# Altium PCB 如意硬件采集模块0831.PcbDoc (part 2 of 3)
Units mm, origin at the board's own origin, x right, y up, seen from the top; angles counter-clockwise.
Board outline 146 x 59 mm, 2 copper layers (Top Layer, Bottom Layer); 262 components, 188 nets, 705 pads, 120 vias.
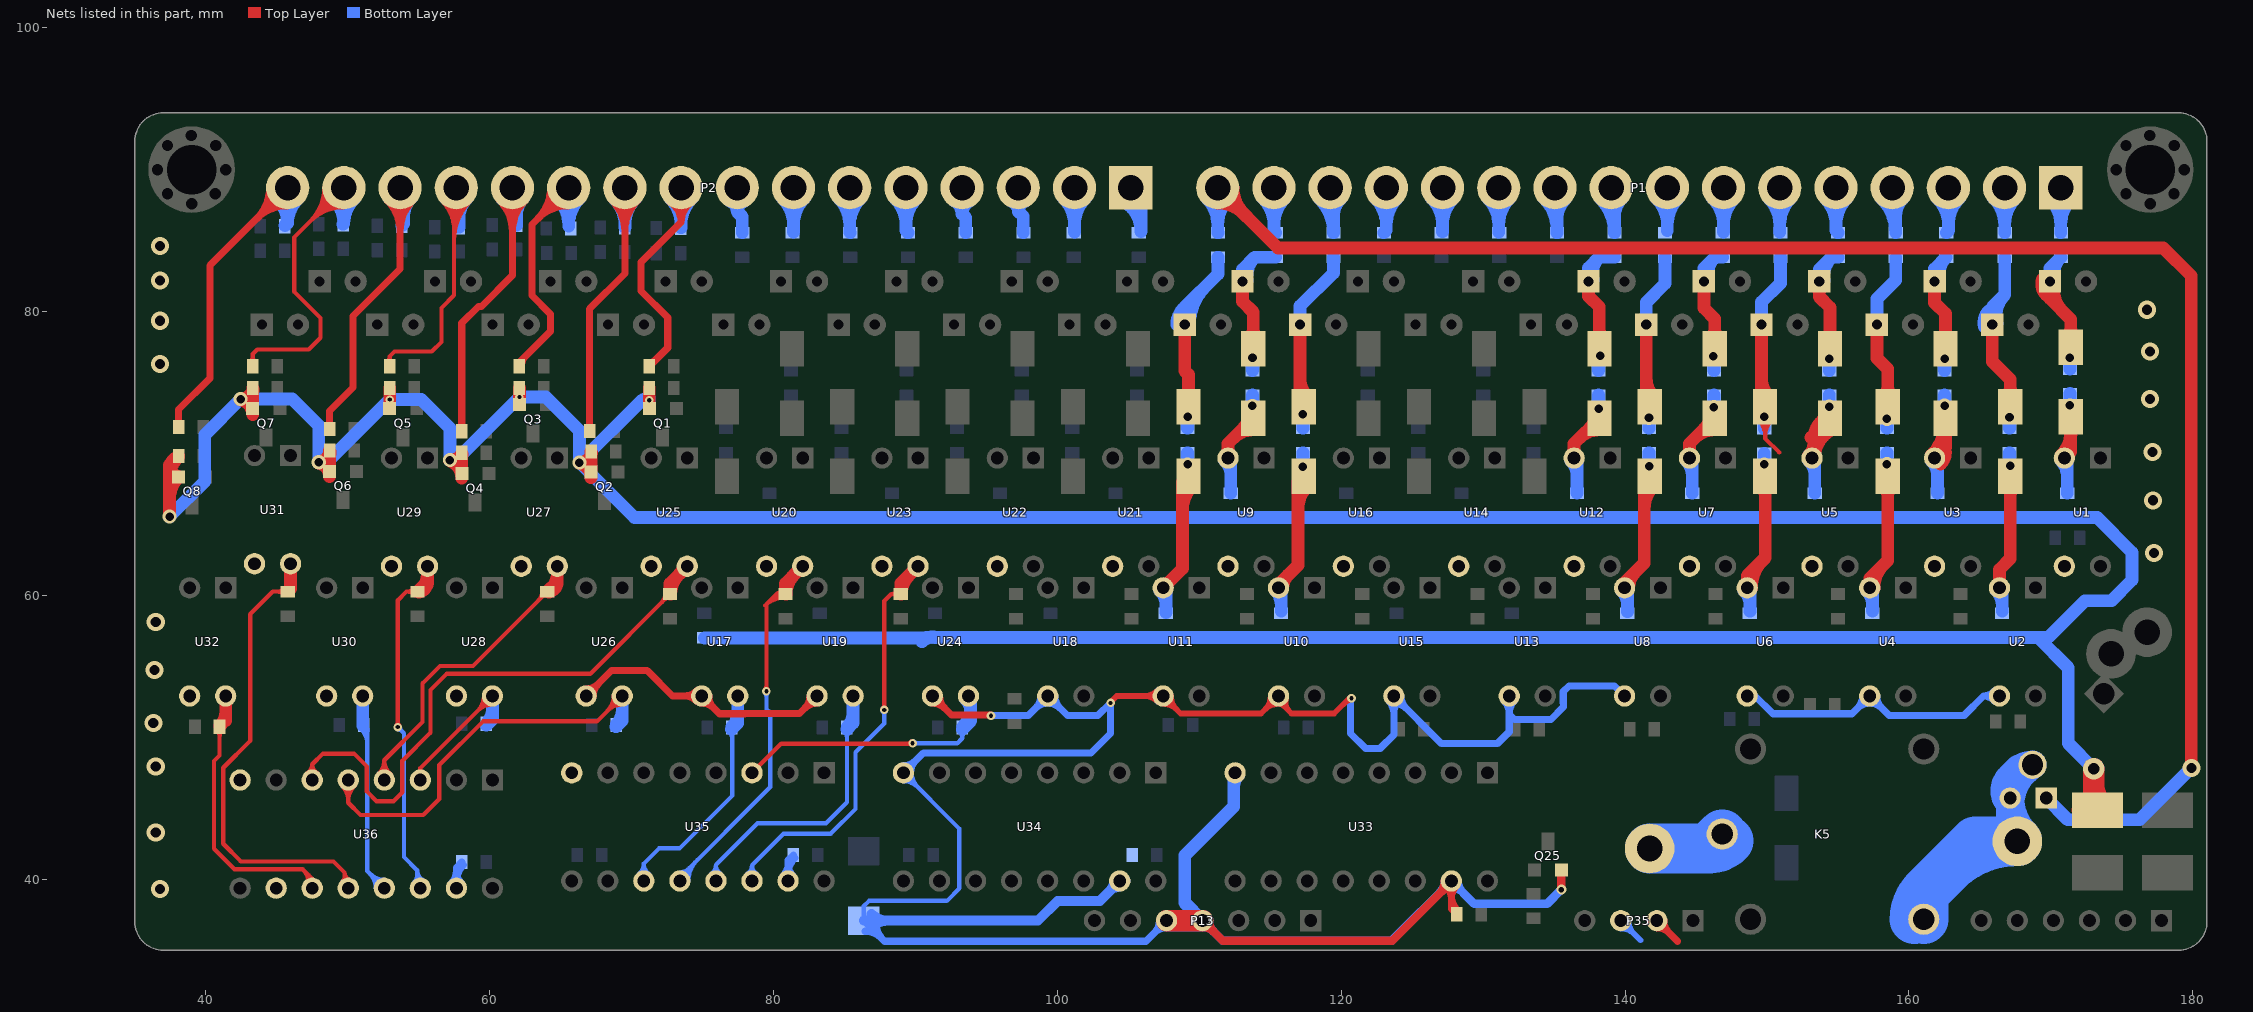
[diagram p2: the nets of this part, all layers, seen from the top]

## Via types
v1: diameter 1, hole 0.6, Top Layer to Bottom Layer, 53 vias
v2: diameter 0.6, hole 0.3, Top Layer to Bottom Layer, 29 vias
v3: diameter 1.27, hole 0.711, Top Layer to Bottom Layer, 19 vias
v4: diameter 1.5, hole 0.8, Top Layer to Bottom Layer, 17 vias
v5: diameter 3, hole 1.8, Top Layer to Bottom Layer, 1 vias
v6: diameter 0.7, hole 0.4, Top Layer to Bottom Layer, 1 vias

## Nets (pads, with @x,y where several pads share a name; then routed paths per layer and width w, separated by ;. In a path a pad name is that pad's centre, name@x,y a point inside that pad or via, vN(x,y) a via of type N, cw(c..) or ccw(c..) an arc to the next point about the centre after c; other vN are vias at no path point) (continued)
_IOIN20: R96.2 U24.4 U35.3 | length 23.9
  Top Layer w0.3: U35.3@78.486,47.498 80.538,49.55 v2@89.8,49.55 ; 89.378,49.55 ccw(c89.378,49.997) v2@89.694,49.681 ; 89.498,49.55 cw(c89.498,49.273) v2@89.694,49.469
  Top Layer w0.9: U24.4@93.738,52.911 U24.4@93.9,52.749
  Bottom Layer w0.3: v2(89.8,49.575) 92.946,49.575 93.303,49.932 93.303,50.568 R96.2@93.303,50.682 ; v2@89.906,49.469 cw(c90.162,49.213) 90.162,49.575 cw(c90.162,49.937) v2@89.906,49.681 ; R96.2@93.122,50.407 cw(c92.684,49.969) 93.303,49.969 cw(c93.922,49.969) R96.2@93.484,50.407
  Bottom Layer w0.9: R96.2@93.303,50.568 93.9,51.165 U24.4@93.9,52.749 ; R96.2@93.334,50.745 ccw(c91.967,52.112) 93.9,52.112 ; U24.4@93.526,52.699 cw(c92.623,51.796) 93.9,51.796
_IOIN21: R95.2 U23.4 U35.14 | length 34.3
  Top Layer w0.3: v2@87.694,52.031 ccw(c87.438,52.287) 87.8,52.287 ccw(c88.162,52.287) v2@87.906,52.031 ; v2(87.8,51.925) 87.8,59.6 88.296,60.096 ; R95.2@88.686,59.924 ccw(c88.296,59.57) 88.296,60.096 ; R95.2@88.686,60.268 cw(c88.296,60.622) 88.296,60.096 ; R95.2@88.969,60.096 88.296,60.096
  Top Layer w0.9: R95.2@88.969,60.096 88.969,60.842 U23.4@90.182,62.055 ; R95.2@89.019,60.096 cw(c90.941,60.096) 89.582,61.455
  Bottom Layer w0.3: U35.14@78.158,40.38 ccw(c77.763,40.986) 78.486,40.986 ; U35.14@78.486,39.878 78.486,40.986 ; U35.14@78.814,40.38 cw(c79.209,40.986) 78.486,40.986 ; v2@87.694,51.819 cw(c87.438,51.563) 87.8,51.563 cw(c88.162,51.563) v2@87.906,51.819 ; v2(87.8,51.925) 87.8,50.975 85.775,48.95 85.775,44.95 84.025,43.2 80.7,43.2 78.486,40.986
_IOIN22: R91.2 U19.4 U35.13 | length 23.6
  Bottom Layer w0.3: U35.13@75.605,40.372 ccw(c75.157,41.021) 75.946,41.021 ; U35.13@75.946,39.878 75.946,41.021 ; U35.13@76.287,40.372 cw(c76.735,41.021) 75.946,41.021 ; R91.2@84.994,50.407 cw(c84.556,49.969) 85.175,49.969 cw(c85.794,49.969) R91.2@85.356,50.407 ; R91.2@85.175,50.682 85.175,50.568 85.175,45.425 83.7,43.95 78.875,43.95 75.946,41.021
  Bottom Layer w0.9: R91.2@85.175,50.568 85.61,51.003 U19.4@85.61,52.911 ; R91.2@85.206,50.745 ccw(c84.23,51.721) 85.61,51.721
_IOIN23: R92.2 U20.4 U35.12 | length 36.8
  Top Layer w0.3: v2@79.394,53.356 ccw(c79.138,53.612) 79.5,53.612 ccw(c79.862,53.612) v2@79.606,53.356 ; 79.411,59.286 cw(c80.747,57.95) R92.2@80.747,59.84 ; v2@79.5,53.275 79.5,59.375 80.221,60.096 ; 79.923,59.798 cw(c80.747,58.974) R92.2@80.747,60.14 ; 79.958,59.833 cw(c80.31,59.48) R92.2@80.599,59.887 ; 80.209,60.084 cw(c80.519,59.774) R92.2@80.773,60.132 ; R92.2@80.546,59.938 ccw(c80.221,59.684) 80.221,60.096 ; R92.2@80.546,60.254 cw(c80.221,60.508) 80.221,60.096 ; R92.2@80.841,60.096 80.221,60.096
  Top Layer w0.9: R92.2@80.841,60.096 80.841,60.842 U20.4@82.054,62.055 ; R92.2@80.891,60.096 cw(c82.813,60.096) 81.454,61.455
  Bottom Layer w0.3: U35.12@73.406,39.878 73.406,40.131 79.775,46.5 79.775,51.725 79.5,52 v2(79.5,53.25) ; U35.12@73.406,40.478 ccw(c73.406,41.316) 73.998,40.723 ; U35.12@73.706,39.878 cw(c75.041,39.878) 74.097,40.822 ; U35.12@74.006,39.878 cw(c76.065,39.878) 74.609,41.334 ; v2@79.394,53.144 cw(c79.138,52.888) 79.5,52.888 cw(c79.862,52.888) v2@79.606,53.144
_IOIN24: R89.2 U17.4 U35.11 | length 20.6
  Bottom Layer w0.3: U35.11@70.494,40.349 ccw(c69.889,41.116) 70.866,41.116 ; U35.11@70.866,39.878 70.866,41.116 ; U35.11@71.238,40.349 cw(c71.843,41.116) 70.866,41.116 ; R89.2@76.866,50.407 cw(c76.3,49.841) 77.1,49.841 ; R89.2@77.047,50.682 77.1,50.629 77.1,50.621 77.1,45.9 73.375,42.175 71.925,42.175 70.866,41.116 ; 77.1,50.097 cw(c77.538,50.097) R89.2@77.228,50.407
  Bottom Layer w0.9: R89.2@77.047,50.568 77.1,50.621 77.482,51.003 U17.4@77.482,52.911 ; R89.2@77.078,50.745 ccw(c76.102,51.721) 77.482,51.721
_IOIN25: R129.2 U25.4 U36.6 | length 44.5
  Top Layer w0.3: U36.6@47.17,47.492 ccw(c46.775,48.098) 47.498,48.098 ; U36.6@47.498,46.99 47.498,48.098 ; U36.6@47.826,47.492 cw(c48.221,48.098) 47.498,48.098 ; 72.116,59.499 ccw(c71.518,60.096) R129.2@72.363,60.096 ; R129.2@72.341,59.724 cw(c72.619,59.447) R129.2@72.619,59.84 ; R129.2@72.713,60.096 67.088,54.471 56.971,54.471 55.829,53.329 55.829,50.329 53.85,48.35 53.85,46.125 53.225,45.5 52.025,45.5 51.35,46.175 51.35,47.95 50.45,48.85 48.25,48.85 47.498,48.098
  Top Layer w0.9: R129.2@72.713,60.096 72.713,60.842 U25.4@73.926,62.055 ; R129.2@72.763,60.096 cw(c74.685,60.096) 73.326,61.455
_IOIN26: R130.2 U26.4 U36.5 | length 34.1
  Top Layer w0.3: U36.5@49.614,46.566 cw(c48.589,45.541) 50.038,45.541 cw(c51.487,45.541) U36.5@50.462,46.566 ; U36.5@50.038,46.99 50.038,45.387 50.9,44.525 55.325,44.525 56.45,45.65 56.45,48.05 59.525,51.125 67.556,51.125 U26.4@69.342,52.911 ; U26.4@68.742,52.911 cw(c67.293,52.911) 68.318,51.887 cw(c69.342,50.862) U26.4@69.342,52.311
  Bottom Layer w0.9: R130.2@68.907,50.743 69.342,51.178 U26.4@69.342,52.911 ; R130.2@68.938,50.92 ccw(c67.962,51.896) 69.342,51.896
_IOIN27: R131.2 U27.4 U36.4 | length 27.2
  Top Layer w0.3: U36.4@52.167,47.427 ccw(c51.273,48.378) 52.578,48.378 ; U36.4@52.578,46.99 52.578,48.378 ; U36.4@52.989,47.427 cw(c53.883,48.378) 52.578,48.378 ; 63.468,59.674 ccw(c62.87,60.271) R131.2@63.715,60.271 ; R131.2@63.693,59.899 cw(c63.971,59.622) R131.2@63.971,60.015 ; R131.2@64.065,60.271 58.819,55.025 56.5,55.025 55.275,53.8 55.275,51.075 52.578,48.378
  Top Layer w0.9: R131.2@64.065,60.271 64.77,60.976 ; R131.2@64.168,60.228 ccw(c64.005,60.976) 64.77,60.976 ; R131.2@64.189,60.24 ccw(c62.788,61.642) U27.4@64.77,61.642 ; U27.4@64.77,62.055 64.77,60.976
_IOIN28: R132.2 U28.4 U36.3 | length 13.6
  Top Layer w0.3: U36.3@55.118,46.99 55.118,47.831 U28.4@60.198,52.911 ; U28.4@59.598,52.911 cw(c58.149,52.911) 59.174,51.887 cw(c60.198,50.862) U28.4@60.198,52.311
  Bottom Layer w0.9: R132.2@59.763,50.843 60.198,51.278 U28.4@60.198,52.911 ; R132.2@59.794,51.02 ccw(c58.818,51.996) 60.198,51.996
_IOIN29: R133.2 U29.4 U36.14 | length 31.5
  Top Layer w0.3: v2@53.419,50.831 ccw(c53.163,51.087) 53.525,51.087 ccw(c53.887,51.087) v2@53.631,50.831 ; v2(53.525,50.725) 53.525,59.65 54.146,60.271 R133.2@54.921,60.271 ; R133.2@54.646,60.09 ccw(c54.208,59.652) 54.208,60.271 ccw(c54.208,60.89) R133.2@54.646,60.452
  Top Layer w0.9: R133.2@54.921,60.271 55.626,60.976 ; R133.2@55.024,60.228 ccw(c54.861,60.976) 55.626,60.976 ; R133.2@55.045,60.24 ccw(c53.644,61.642) U29.4@55.626,61.642 ; U29.4@55.626,62.055 55.626,60.976
  Bottom Layer w0.3: v2@53.525,50.575 cw(c53.525,50.213) 53.781,50.469 cw(c54.037,50.725) v2@53.675,50.725 ; v2(53.525,50.725) 53.964,50.286 53.964,41.561 54.9,40.625 ; U36.14@54.694,39.794 ccw(c54.196,40.292) 54.9,40.292 ; 54.9,40.165 ccw(c55.469,40.165) U36.14@55.239,39.644 ; U36.14@55.118,39.37 54.9,39.588 54.9,40.625 ; U36.14@55.36,39.919 cw(c55.672,40.625) 54.9,40.625
_IOIN30: R134.2 U30.4 U36.13 | length 18.2
  Bottom Layer w0.3: R134.2@50.946,50.582 cw(c49.909,49.546) 51.375,49.546 ; R134.2@51.127,50.857 51.375,50.609 51.375,40.573 U36.13@52.578,39.37 ; R134.2@51.158,50.794 cw(c50.634,50.27) 51.375,50.27 ; U36.13@51.978,39.37 ccw(c50.529,39.37) 51.554,40.394 ccw(c52.578,41.419) U36.13@52.578,39.97
  Bottom Layer w0.9: R134.2@51.054,50.816 U30.4@51.054,52.911
_IOIN31: R135.2 U31.4 U36.12 | length 35.3
  Top Layer w0.3: R135.2@45.502,60.09 ccw(c45.064,59.652) 45.064,60.271 ccw(c45.064,60.89) R135.2@45.502,60.452 ; R135.2@45.777,60.271 44.721,60.271 43.125,58.675 43.125,49.75 41.225,47.85 41.225,42.5 42.471,41.254 48.996,41.254 49.775,40.475 ; U36.12@49.614,39.794 ccw(c49.224,40.184) 49.775,40.184 ; 49.775,40.091 ccw(c50.218,40.091) U36.12@50.111,39.661 ; U36.12@50.038,39.37 49.775,39.633 49.775,40.475 ; U36.12@50.183,39.952 cw(c50.314,40.475) 49.775,40.475
  Top Layer w0.9: R135.2@45.974,60.468 U31.4@45.974,62.23
_IOIN32: R136.2 U32.4 U36.11 | length 23.3
  Top Layer w0.3: R136.2@40.786,50.468 cw(c40.348,50.03) 40.967,50.03 cw(c41.586,50.03) R136.2@41.148,50.468 ; R136.2@40.967,50.743 40.967,48.717 40.575,48.325 40.575,42.15 42.025,40.7 46.825,40.7 47.498,40.027 U36.11@47.498,39.37 ccw(c46.569,39.602) 47.246,40.279 ; 46.871,40.654 cw(c45.969,39.752) U36.11@47.207,39.443
  Top Layer w0.9: R136.2@40.998,50.806 ccw(c40.022,51.782) 41.402,51.782 ; 41.402,51.178 U32.4@41.402,52.911
GND: C1.1 C2.1 C3.1 C4.1 D59.1 P13.4 P13.5 P35.2 Q25.E U1.3 U2.3 U3.3 U4.3 U5.3 U6.3 U7.3 U8.3 U9.3 U10.3 U11.3 U12.3 U13.3 U14.3 U15.3 U16.3 U17.3 U18.3 U19.3 U20.3 U21.3 U22.3 U23.3 U24.3 U25.3 U26.3 U27.3 U28.3 U29.3 U30.3 U31.3 U32.3 U33.8 U33.15 U34.8 U34.15 U35.8 U35.15 U36.8 U36.10 U36.15 | length 325.3
  Top Layer w0.4: v2@103.7,52.425 104.186,52.911 U11.3@107.454,52.911 108.686,51.679 114.35,51.679 U10.3@115.582,52.911 ; v2@103.85,52.425 cw(c104.212,52.425) 103.956,52.681 ; U11.3@107.065,52.522 ccw(c106.126,51.583) 106.126,52.911 ccw(c106.126,54.239) U11.3@107.065,53.3 ; U11.3@107.454,52.361 cw(c107.454,51.033) 108.393,51.972 cw(c109.332,52.911) U11.3@108.004,52.911 ; U10.3@115.032,52.911 cw(c113.704,52.911) 114.643,51.972 cw(c115.582,51.033) 115.582,52.361 cw(c115.582,51.801) 115.978,52.197 ; U10.3@115.582,52.593 116.496,51.679 119.504,51.679 v2@120.65,52.825 ; U10.3@116.108,52.751 ccw(c116.984,52.485) 116.337,51.838 ; 120.298,52.473 cw(c120.725,52.046) v2@120.725,52.65
  Top Layer w0.5: U26.3@66.802,52.911 68.591,54.7 71.1,54.7 72.889,52.911 U17.3@74.942,52.911 76.196,51.657 78.001,51.657 78.019,51.675 81.834,51.675 U19.3@83.07,52.911 ; U26.3@66.802,53.411 ccw(c66.802,54.618) 67.656,53.765 ccw(c68.509,52.911) U26.3@67.302,52.911 ; U17.3@74.588,52.557 ccw(c73.735,51.704) 73.735,52.911 ccw(c73.735,54.118) U17.3@74.588,53.265 ; U17.3@74.942,52.411 cw(c74.942,51.204) 75.796,52.057 cw(c76.649,52.911) U17.3@75.442,52.911 ; U19.3@82.57,52.911 cw(c81.363,52.911) 82.216,52.057 cw(c83.07,51.204) U19.3@83.07,52.411 ; U24.3@91.198,52.411 cw(c91.198,51.204) 92.052,52.057 cw(c92.905,52.911) U24.3@91.698,52.911 ; U24.3@91.198,52.911 92.534,51.575 v2@95.3,51.575 ; U10.3@115.582,52.593 U10.3@115.582,52.911 ; U33.15@127.408,39.524 cw(c126.555,38.671) 127.762,38.671 cw(c128.969,38.671) U33.15@128.116,39.524 ; 127.762,38.918 ccw(c129.429,38.918) C1.1@128.25,37.739 ; U33.15@127.762,39.878 127.762,39.837 127.762,37.913 C1.1@128.14,37.535 ; P35.2@142.24,36.584 cw(c142.24,35.377) 143.094,36.23 cw(c143.947,37.084) P35.2@142.74,37.084 ; P35.2@142.24,37.084 143.693,35.631
  Top Layer w0.6: P13.4@110.236,36.634 cw(c110.236,35.548) 111.004,36.316 cw(c111.772,37.084) P13.4@110.686,37.084 ; P13.4@110.236,37.084 111.639,35.681 123.606,35.681 U33.15@127.762,39.837 ; 126.965,39.04 ccw(c126.127,39.878) U33.15@127.312,39.878 ; 127.064,39.139 cw(c127.762,38.441) U33.15@127.762,39.428 ; v6(135.509,39.266) Q25.E@135.509,40.64
  Top Layer w1.5: P13.5@107.696,37.084 P13.4@110.236,37.084
  Bottom Layer w0.3: D59.1@86.36,37.084 86.36,38.11 86.725,38.475 92.215,38.475 93.1,39.36 93.08,39.38 93.08,43.572 U34.8@89.154,47.498 ; U34.8@89.154,46.898 cw(c89.154,45.449) 90.178,46.474 cw(c91.203,47.498) U34.8@89.754,47.498
  Bottom Layer w0.5: U36.15@57.304,39.724 ccw(c56.451,40.577) 57.658,40.577 ccw(c58.865,40.577) U36.15@58.012,39.724 ; U36.15@57.658,39.37 57.658,40.827 C4.1@58.036,41.205 ; U36.15@57.658,39.822 cw(c59.325,39.822) C4.1@58.146,41.001 ; U35.15@80.672,40.232 ccw(c79.819,41.085) 81.026,41.085 ccw(c82.233,41.085) U35.15@81.38,40.232 ; U35.15@81.026,39.878 81.026,41.335 C3.1@81.404,41.713 ; U35.15@81.026,40.33 cw(c82.693,40.33) C3.1@81.514,41.509 ; D59.1@86.36,37.084 87.813,35.631 106.243,35.631 P13.5@107.696,37.084 ; D59.1@86.46,36.334 cw(c86.46,34.765) 87.57,35.874 ; D59.1@87.21,37.065 ccw(c89.1,37.018) 87.763,35.681 ; U34.8@89.154,47.498 90.556,48.9 102.375,48.9 103.75,50.275 v2(103.75,52.425) 102.85,51.525 100.712,51.525 U18.3@99.326,52.911 97.965,51.55 95.35,51.55 v2(95.325,51.525) ; U34.8@89.154,47.998 ccw(c89.154,49.205) 90.008,48.352 ccw(c90.861,47.498) U34.8@89.654,47.498 ; U18.3@98.826,52.911 cw(c97.619,52.911) 98.472,52.057 cw(c99.326,51.204) 99.326,52.411 cw(c99.326,51.204) 100.18,52.057 cw(c101.033,52.911) U18.3@99.826,52.911 ; P13.5@107.196,37.084 cw(c105.989,37.084) 106.842,36.23 cw(c107.696,35.377) P13.5@107.696,36.584 ; 120.65,52.448 cw(c121.027,52.448) v2@120.76,52.715 ; v2@120.65,52.75 120.65,50.275 121.7,49.225 122.75,49.225 123.71,50.185 U15.3@123.71,52.911 127.071,49.55 131,49.55 131.838,50.388 131.838,51.612 ; U15.3@123.356,52.557 cw(c122.503,51.704) 123.71,51.704 cw(c124.917,51.704) U15.3@124.064,52.557 ; U15.3@123.71,52.411 cw(c123.71,51.204) 124.564,52.057 cw(c125.417,52.911) U15.3@124.21,52.911 ; U13.3@131.484,52.557 cw(c130.631,51.704) 131.838,51.704 cw(c133.045,51.704) U13.3@132.192,52.557 ; U13.3@131.838,52.911 131.838,51.612 ; U8.3@139.966,52.911 139.252,53.625 136.05,53.625 135.646,53.221 135.646,52.417 135.65,52.413 135.65,52.125 134.775,51.25 132.2,51.25 131.838,51.612 ; U6.3@148.602,52.911 149.162,52.911 150.416,51.657 155.984,51.657 U4.3@157.238,52.911 158.599,51.55 163.9,51.55 165.261,52.911 ; U4.3@156.738,52.911 cw(c155.531,52.911) 156.384,52.057 cw(c157.238,51.204) 157.238,52.411 cw(c157.238,51.204) 158.092,52.057 cw(c158.945,52.911) U4.3@157.738,52.911 ; U2.3@166.01,52.577 ccw(c165.261,51.904) 165.261,52.911 ; U2.3@166.01,53.245 cw(c165.261,53.917) 165.261,52.911 ; U2.3@166.382,52.911 165.261,52.911
  Bottom Layer w0.6: P13.4@110.236,36.634 cw(c110.236,35.548) 111.004,36.316 cw(c111.772,37.084) P13.4@110.686,37.084 ; P13.4@110.236,37.084 111.639,35.681 123.565,35.681 U33.15@127.762,39.878 129.365,38.275 134.518,38.275 v6(135.509,39.266) ; U33.15@127.312,39.878 cw(c126.226,39.878) 126.994,39.11 cw(c127.762,38.342) 127.762,39.428 cw(c127.762,38.342) 128.53,39.11 cw(c129.298,39.878) U33.15@128.212,39.878
  Bottom Layer w0.7: D59.1@86.36,37.084 98.634,37.084 100.025,38.475 102.991,38.475 U34.15@104.394,39.878 ; D59.1@86.92,36.624 cw(c88.029,35.515) 88.029,37.084 cw(c88.029,38.653) D59.1@86.92,37.544 ; U34.15@103.994,39.878 cw(c103.028,39.878) 103.711,39.195 cw(c104.394,38.512) U34.15@104.394,39.478
  Bottom Layer w0.9: U34.15@104.394,39.878 U34.15@104.697,39.878 ; P13.5@107.491,37.084 P13.5@107.696,37.084 ; P13.5@107.672,37.084 P13.5@107.696,37.084 ; P13.5@107.716,37.084 P13.5@107.696,37.084 ; P13.4@110.236,37.084 108.975,38.345 108.975,41.675 112.425,45.125 112.425,47.401 U33.8@112.522,47.498 ; 112.425,46.54 cw(c113.48,46.54) U33.8@112.734,47.286
  Bottom Layer w1.5: P13.5@107.716,37.084 P13.4@110.236,37.084
  other v2: 120.725,52.75
  other v3: 36.779,39.325 36.475,43.282 36.475,47.955 36.3,51.003 36.373,54.75 36.475,58.115 177.275,62.992 177.19,66.7 177.15,70.104 176.987,73.825 36.779,76.3 176.987,77.175 36.779,79.35 176.784,80.125 36.779,82.175 36.779,84.625
GND_DI: F2.1 Q1.3 Q2.3 Q3.3 Q4.3 Q5.3 Q6.3 Q7.3 Q8.3 R2.1 R4.1 R6.1 R8.1 R10.1 R12.1 R14.1 R16.1 R34.1 R36.1 R38.1 R40.1 R42.1 R44.1 R46.1 R48.1 R66.1 R68.1 R70.1 R72.1 R74.1 R76.1 R78.1 R80.1 R121.1 R122.1 R123.1 R124.1 R125.1 R126.1 R127.1 R128.1 | length 329.5
  Top Layer w0.9: v1(37.45,65.55) 37.45,69.186 ; 37.45,66.794 cw(c39.652,66.794) Q8.3@38.095,68.351 ; 37.45,68.297 cw(c39.519,68.297) R128.1@38.056,69.76 ; 37.45,68.892 cw(c38.381,68.892) R128.1@38.072,69.771 ; R128.1@38.087,69.823 37.45,69.186 ; Q8.3@38.092,68.363 cw(c38.299,69.186) 37.45,69.186 ; v1@42.437,73.779 cw(c42.245,72.738) Q7.3@43.304,72.738 ; Q7.3@43.3,73.15 ccw(c42.446,72.952) v1(42.446,73.829) ; Q7.3@43.304,73.155 43.304,73.829 ; R127.1@43.304,74.619 43.304,73.829 ; R127.1@43.346,74.514 cw(c42.446,74.761) v1(42.446,73.829) ; v1@47.944,69.329 cw(c47.754,68.376) Q6.3@48.726,68.376 ; v1@47.953,69.428 ccw(c47.951,70.203) R126.1@48.726,70.203 48.726,69.378 ; Q6.3@48.722,68.735 ccw(c47.953,68.598) v1(47.953,69.378) ; Q6.3@48.726,68.739 48.726,69.378 ; R126.1@48.769,70.104 cw(c47.953,70.2) v1(47.953,69.378) ; Q5.3@52.956,73.155 R125.1@52.956,74.619 ; v1@57.186,69.481 cw(c56.746,68.269) Q4.3@58.036,68.269 ; Q4.3@58.039,68.58 58.036,68.583 58.036,69.528 ; R124.1@58.039,70.044 R124.1@58.036,70.047 58.036,69.528 ; R124.1@58.069,69.925 cw(c57.203,70.671) v1(57.203,69.528) 58.036,69.528 ; Q3.3@62.1,73.438 R123.1@62.1,74.619 ; v1@66.319,69.304 cw(c66.118,68.294) Q2.3@67.148,68.294 ; Q2.3@67.144,68.678 ccw(c66.328,68.523) v1(66.328,69.353) ; R122.1@67.148,70.146 67.148,69.353 ; Q2.3@67.151,68.679 67.148,68.682 67.148,69.353 ; R122.1@67.19,70.043 cw(c66.328,70.237) v1(66.328,69.353) ; Q1.3@71.244,73.155 R121.1@71.244,74.619 ; v1(42.446,73.829) 43.304,73.829 ; v1(47.953,69.378) 48.726,69.378 ; v1(66.328,69.353) 67.148,69.353
  Top Layer w1.5: F2.1@172.212,44.872 173.025,45.685 v4(173.025,47.775) ; 173.025,46.712 ccw(c175.127,46.712) F2.1@173.641,45.226
  Bottom Layer w0.9: v1(37.45,65.55) 39.925,68.025 39.925,71.307 v1(42.446,73.829) 46.096,73.829 47.953,71.972 v1(47.953,69.378) 48.534,69.378 v2(52.956,73.8) 55.175,73.8 57.203,71.772 v1(57.203,69.528) 57.653,69.528 v2(62.1,73.975) 63.95,73.975 66.328,71.597 v1(66.328,69.353) ; v1@47.953,69.428 ccw(c47.953,70.951) 49.03,69.874 ; v1@57.203,69.578 ccw(c57.203,70.785) 58.057,69.932 ; v2(71.244,73.75) 70.725,73.75 v1(66.328,69.353) ; R66.1@75.139,57 90.732,57 90.769,57.037 ; 90.463,56.731 cw(c91.266,55.928) R80.1@91.29,57.063 ; 90.5,56.768 cw(c91.219,56.048) R80.1@91.293,57.063 ; R80.1@91.383,57.037 169.088,57.037 171.225,54.9 171.225,49.575 v4(173.025,47.775) ; 169.075,57.05 169.825,57.05 172.4,59.625 174.275,59.625 175.725,61.075 175.725,63.025 173.269,65.481 R2.1@171.151,65.481 R6.1@162.007,65.481 R10.1@153.371,65.481 R14.1@144.735,65.481 R40.1@136.607,65.481 R44.1@128.479,65.481 R48.1@120.351,65.481 R34.1@112.223,65.481 R74.1@104.095,65.481 R76.1@95.967,65.481 R78.1@88.347,65.481 R72.1@79.711,65.481 70.201,65.481 v1(66.328,69.353) ; 70.614,73.639 cw(c71.244,73.01) 71.244,73.9 ccw(c71.244,73.01) 70.614,73.639
GND_DI0: K5.3 P48.1 | length 7
  Bottom Layer w3.5: P48.1@141.732,42.164 145.829,42.164 K5.3@146.845,43.18 ; 145.961,42.164 ccw(c145.961,44.064) K5.3@147.305,42.72
IO_OUT: P35.3 | length 4
  Bottom Layer w0.4: P35.3@139.7,36.534 cw(c139.7,35.206) 140.639,36.145 cw(c141.578,37.084) P35.3@140.25,37.084 ; P35.3@139.7,37.084 141.084,35.7
IOIN1: P1.1 R1.1 | length 7.2
  Bottom Layer w0.9: P1.1@169.941,87.966 cw(c168.107,86.132) 170.7,86.132 cw(c173.293,86.132) P1.1@171.459,87.966 ; R1.1@170.7,85.56 P1.1@170.7,88.725
IOIN2: P1.2 R3.1 | length 7.2
  Bottom Layer w0.9: P1.2@165.981,87.966 cw(c164.121,86.106) 166.751,86.106 ; R3.1@166.751,85.553 P1.2@166.751,88.714 ; 166.751,86.159 cw(c169.306,86.159) P1.2@167.499,87.966
IOIN3: P1.3 R5.1 | length 7.3
  Bottom Layer w0.9: P1.3@162.021,87.966 cw(c160.187,86.132) 162.78,86.132 cw(c165.373,86.132) P1.3@163.539,87.966 ; R5.1@162.629,85.553 162.78,85.704 P1.3@162.78,88.725
IOIN4: P1.4 R7.1 | length 13.1
  Bottom Layer w0.9: P1.4@158.064,87.962 cw(c155.669,85.543) R7.1@159.073,85.543 ; P1.4@158.443,87.719 cw(c158.102,86.81) 159.073,86.81 cw(c160.642,86.81) P1.4@159.56,87.947 ; P1.4@158.82,88.725 158.82,87.08 ; R7.1@159.073,85.553 159.073,86.827 158.82,87.08 ; 159.073,86.743 cw(c160.802,86.743) P1.4@159.579,87.966 ; 158.82,87.08 ccw(c158.097,87.08) 158.388,87.742 cw(c158.097,87.08) 158.82,87.08 ; 158.82,87.08 cw(c159.543,87.08) 159.252,87.742 ccw(c159.543,87.08) 158.82,87.08
IOIN5: P1.5 R9.1 | length 7.3
  Bottom Layer w0.9: P1.5@154.101,87.966 cw(c152.267,86.132) 154.86,86.132 cw(c157.453,86.132) P1.5@155.619,87.966 ; P1.5@154.86,88.725 154.86,85.702 R9.1@155.009,85.553
IOIN6: P1.6 R11.1 | length 7.2
  Bottom Layer w0.9: P1.6@150.141,87.966 cw(c148.307,86.132) 150.9,86.132 cw(c153.493,86.132) P1.6@151.659,87.966 ; R11.1@150.9,85.598 P1.6@150.9,88.725
IOIN7: P1.7 R13.1 | length 7.2
  Bottom Layer w0.9: P1.7@146.181,87.966 cw(c144.347,86.132) 146.94,86.132 cw(c149.533,86.132) P1.7@147.699,87.966 ; R13.1@146.94,85.612 P1.7@146.94,88.725
IOIN8: P1.8 R15.1 | length 7.1
  Bottom Layer w0.9: P1.8@142.221,87.966 cw(c140.387,86.132) 142.98,86.132 cw(c145.573,86.132) P1.8@143.739,87.966 ; R15.1@142.98,85.716 P1.8@142.98,88.725
IOIN9: P1.9 R39.1 | length 7.3
  Bottom Layer w0.9: P1.9@138.261,87.966 cw(c135.845,85.55) R39.1@139.261,85.55 ; P1.9@139.02,88.725 139.02,87.605 139.261,87.364 R39.1@139.261,85.553 ; 139.261,86.714 cw(c141.031,86.714) P1.9@139.779,87.966
IOIN10: P1.10 R41.1 | length 7.3
  Bottom Layer w0.9: P1.10@134.301,87.966 cw(c132.136,85.801) R41.1@135.197,85.801 ; P1.10@135.06,88.725 135.197,88.588 R41.1@135.197,85.553 ; 135.197,86.463 cw(c137.322,86.463) P1.10@135.819,87.966
IOIN11: P1.11 R43.1 | length 7.2
  Bottom Layer w0.9: P1.11@130.341,87.966 cw(c128.507,86.132) 131.1,86.132 cw(c133.693,86.132) P1.11@131.859,87.966 ; R43.1@131.1,85.586 P1.11@131.1,88.725
IOIN12: P1.12 R45.1 | length 7.2
  Bottom Layer w0.9: P1.12@126.381,87.966 cw(c124.547,86.132) 127.14,86.132 cw(c129.733,86.132) P1.12@127.899,87.966 ; R45.1@127.14,85.624 P1.12@127.14,88.725
IOIN13: P1.13 R47.1 | length 7.3
  Bottom Layer w0.9: P1.13@122.421,87.966 cw(c120.587,86.132) 123.18,86.132 cw(c125.773,86.132) P1.13@123.939,87.966 ; R47.1@123.005,85.553 123.18,85.728 P1.13@123.18,88.725
IOIN14: P1.14 R35.1 | length 13.5
  Bottom Layer w0.9: P1.14@118.461,87.966 cw(c116.074,85.579) R35.1@119.449,85.579 ; P1.14@118.815,87.73 cw(c118.431,86.788) 119.449,86.788 cw(c121.019,86.788) P1.14@119.951,87.938 ; P1.14@119.22,88.725 119.22,87.03 ; R35.1@119.449,85.553 119.449,86.801 119.22,87.03 ; 119.449,86.685 cw(c121.26,86.685) P1.14@119.979,87.966 ; 119.22,87.03 ccw(c118.42,87.03) 118.761,87.754 cw(c118.42,87.03) 119.22,87.03 ; 119.22,87.03 cw(c120.02,87.03) 119.679,87.754 ccw(c120.02,87.03) 119.22,87.03
IOIN15: P1.15 R33.1 | length 7.3
  Bottom Layer w0.9: P1.15@114.501,87.966 cw(c112.667,86.132) 115.26,86.132 cw(c117.853,86.132) P1.15@116.019,87.966 ; P1.15@115.26,88.725 115.26,85.678 R33.1@115.385,85.553
IOIN16: P1.16 P5.1 R37.1 | length 129.5
  Top Layer w0.9: P1.16@111.3,87.651 cw(c111.3,85.058) 113.133,86.892 cw(c114.967,88.725) P1.16@112.374,88.725 ; P1.16@111.3,88.725 115.55,84.475 177.925,84.475 179.9,82.5 v3(179.9,47.85)
  Bottom Layer w0.9: P1.16@110.541,87.966 cw(c108.707,86.132) 111.3,86.132 cw(c113.893,86.132) P1.16@112.059,87.966 ; P1.16@111.3,88.725 111.3,85.574 R37.1@111.321,85.553 ; P5.1@169.672,45.72 171.196,44.196 176.246,44.196 v3(179.9,47.85)
IOIN17: P2.1 R73.1 | length 7.6
  Bottom Layer w0.9: P2.1@104.64,87.79 cw(c103.423,85.632) R73.1@105.9,85.632 ; P2.1@105.082,88.573 cw(c104.293,87.174) 105.9,87.174 ; P2.1@105.168,88.725 105.9,87.993 R73.1@105.9,85.72
IOIN18: P2.2 R67.1 | length 7.2
  Bottom Layer w0.9: P2.2@100.449,87.966 cw(c98.615,86.132) 101.208,86.132 cw(c103.801,86.132) P2.2@101.967,87.966 ; R67.1@101.208,85.6 P2.2@101.208,88.725
IOIN19: P2.3 R75.1 | length 6.8
  Bottom Layer w0.9: P2.3@97.248,88.725 97.248,87.052 ; R75.1@97.605,85.553 97.605,86.695 97.248,87.052 ; 97.248,87.052 ccw(c96.482,87.052) 96.801,87.748 cw(c96.482,87.052) 97.248,87.052 ; 97.248,87.052 cw(c98.014,87.052) 97.695,87.748 ccw(c98.014,87.052) 97.248,87.052
IOIN20: P2.4 R79.1 | length 7.8
  Bottom Layer w0.9: P2.4@93.288,88.725 93.288,86.862 ; R79.1@93.541,85.553 93.541,86.609 93.288,86.862 ; 93.288,86.862 ccw(c92.209,86.862) 92.75,87.796 cw(c92.209,86.862) 93.288,86.862 ; 93.288,86.862 cw(c94.367,86.862) 93.826,87.796 ccw(c94.367,86.862) 93.288,86.862
IOIN21: P2.5 R77.1 | length 7.3
  Bottom Layer w0.9: P2.5@88.569,87.966 cw(c86.735,86.132) 89.328,86.132 cw(c91.921,86.132) P2.5@90.087,87.966 ; P2.5@89.328,88.725 89.328,85.702 R77.1@89.477,85.553
IOIN22: P2.6 R69.1 | length 7.3
  Bottom Layer w0.9: P2.6@84.609,87.966 cw(c82.775,86.132) 85.368,86.132 cw(c87.961,86.132) P2.6@86.127,87.966 ; P2.6@85.368,88.725 85.368,85.598 R69.1@85.413,85.553
IOIN23: P2.7 R71.1 | length 7.2
  Bottom Layer w0.9: P2.7@80.649,87.966 cw(c78.815,86.132) 81.408,86.132 cw(c84.001,86.132) P2.7@82.167,87.966 ; R71.1@81.408,85.612 P2.7@81.408,88.725
IOIN24: P2.8 R65.1 | length 6.9
  Bottom Layer w0.9: P2.8@77.448,88.725 77.448,87.027 ; R65.1@77.793,85.553 77.793,86.682 77.448,87.027 ; 77.448,87.027 ccw(c76.643,87.027) 76.988,87.755 cw(c76.643,87.027) 77.448,87.027 ; 77.448,87.027 cw(c78.253,87.027) 77.908,87.755 ccw(c78.253,87.027) 77.448,87.027
IOIN25: P2.9 R97.1 R105.1 | length 25.7
  Top Layer w0.5: R105.1@71.244,76.143 72.55,77.449 72.55,79.575 70.675,81.45 70.675,83.475 73.488,86.288 ; R105.1@71.244,76.393 ccw(c71.244,76.997) 71.671,76.57 ; P2.9@72.761,87.679 cw(c71.794,86.288) 73.488,86.288 ; P2.9@73.488,88.725 73.488,86.288 ; P2.9@74.215,87.679 ccw(c75.182,86.288) 73.488,86.288
  Bottom Layer w0.9: P2.9@72.729,87.966 cw(c70.895,86.132) 73.488,86.132 cw(c76.081,86.132) P2.9@74.247,87.966 ; R97.1@73.488,85.905 P2.9@73.488,88.725
IOIN26: P2.10 R98.1 R106.1 | length 32.8
  Top Layer w0.5: R106.1@67.042,71.573 67.042,80.192 69.528,82.678 P2.10@69.528,88.725 ; P2.10@68.627,87.824 cw(c66.452,85.649) 69.528,85.649 cw(c72.604,85.649) P2.10@70.429,87.824 ; P2.10@68.981,88.178 cw(c67.659,86.856) 69.528,86.856 cw(c71.397,86.856) P2.10@70.075,88.178
  Bottom Layer w0.9: P2.10@68.769,87.966 cw(c66.935,86.132) 69.528,86.132 cw(c72.121,86.132) P2.10@70.287,87.966 ; R98.1@69.528,85.924 P2.10@69.528,88.725
IOIN27: P2.11 R99.1 R107.1 | length 30.3
  Top Layer w0.5: R107.1@62.1,76.143 62.1,76.425 64.274,78.599 64.274,79.833 62.983,81.125 62.983,86.14 P2.11@65.568,88.725 ; R107.1@62.256,76.237 cw(c63.088,76.237) 62.5,76.825 ; P2.11@64.294,88.725 cw(c61.218,88.725) 63.393,86.55 cw(c65.568,84.375) P2.11@65.568,87.451 ; P2.11@64.794,88.725 cw(c62.925,88.725) 64.247,87.404 cw(c65.568,86.082) P2.11@65.568,87.951
  Bottom Layer w0.9: P2.11@64.809,87.966 cw(c62.975,86.132) 65.568,86.132 cw(c68.161,86.132) P2.11@66.327,87.966 ; R99.1@65.568,86.002 P2.11@65.568,88.725
IOIN28: P2.12 R100.1 R108.1 | length 32.6
  Top Layer w0.5: R108.1@58.036,71.571 58.036,79.186 59.214,80.364 59.414,80.364 61.608,82.558 P2.12@61.608,88.725 ; P2.12@60.707,87.824 cw(c58.532,85.649) 61.608,85.649 cw(c64.684,85.649) P2.12@62.509,87.824 ; P2.12@61.061,88.178 cw(c59.739,86.856) 61.608,86.856 cw(c63.477,86.856) P2.12@62.155,88.178
  Bottom Layer w0.9: P2.12@60.987,87.849 cw(c59.738,86.085) R100.1@61.899,86.085 ; P2.12@61.608,88.725 61.608,87.492 61.899,87.201 R100.1@61.899,86.101 ; 61.899,86.835 cw(c63.498,86.835) P2.12@62.367,87.966
IOIN29: P2.13 R101.1 R109.1 | length 36.5
  Top Layer w0.3: R109.1@52.78,76.423 ccw(c52.396,76.831) 52.956,76.831 ; R109.1@52.956,76.143 52.956,76.831 ; R109.1@53.132,76.423 cw(c53.516,76.831) 52.956,76.831 ; P2.13@56.676,87.753 cw(c54.701,85.778) 57.495,85.778 ; P2.13@56.889,87.966 cw(c55.425,86.502) 57.495,86.502 ; 57.495,85.038 cw(c61.335,85.038) P2.13@58.62,87.753 ; 57.495,85.762 cw(c60.611,85.762) P2.13@58.407,87.966 ; 57.495,86.486 cw(c59.887,86.486) P2.13@58.195,88.178 ; P2.13@57.648,88.725 57.495,88.572 57.495,81.145 56.6,80.25 56.6,77.85 55.925,77.175 53.3,77.175 52.956,76.831
  Bottom Layer w0.9: P2.13@56.945,87.913 cw(c55.233,85.936) R101.1@57.848,85.936 ; P2.13@57.37,87.688 cw(c57.203,87.065) 57.848,87.065 cw(c58.788,87.065) P2.13@58.256,87.84 ; P2.13@57.648,88.725 57.648,87.277 57.848,87.077 R101.1@57.848,85.943 ; 57.848,86.615 cw(c59.758,86.615) P2.13@58.407,87.966
IOIN30: P2.14 R102.1 R110.1 | length 35.1
  Top Layer w0.5: R110.1@48.726,71.727 48.726,73.001 50.375,74.65 50.375,79.675 53.688,82.988 P2.14@53.688,88.725 ; P2.14@52.787,87.824 cw(c50.612,85.649) 53.688,85.649 cw(c56.764,85.649) P2.14@54.589,87.824 ; P2.14@53.141,88.178 cw(c51.819,86.856) 53.688,86.856 cw(c55.557,86.856) P2.14@54.235,88.178
  Bottom Layer w0.9: P2.14@53.078,87.841 cw(c51.929,86.178) R102.1@53.95,86.178 ; P2.14@53.38,87.696 cw(c53.151,86.931) 53.95,86.931 cw(c55.264,86.931) P2.14@54.397,87.918 ; P2.14@53.688,88.725 53.688,87.212 53.95,86.95 53.95,86.192 R102.1@53.801,86.043 ; 53.95,86.765 cw(c55.648,86.765) P2.14@54.447,87.966
IOIN31: P2.15 R103.1 R111.1 | length 38.6
  Top Layer w0.3: R111.1@43.122,76.418 ccw(c42.685,76.856) 43.304,76.856 ccw(c43.923,76.856) R111.1@43.485,76.418 ; R111.1@43.304,76.143 43.304,77.004 43.625,77.325 47.25,77.325 48.075,78.15 48.075,79.55 46.225,81.4 46.225,85.222 P2.15@49.728,88.725 ; P2.15@48.354,88.725 cw(c45.037,88.725) 47.382,86.379 cw(c49.728,84.034) P2.15@49.728,87.351 ; P2.15@48.654,88.725 cw(c46.061,88.725) 47.895,86.892 cw(c49.728,85.058) P2.15@49.728,87.651 ; P2.15@48.954,88.725 cw(c47.085,88.725) 48.407,87.404 cw(c49.728,86.082) P2.15@49.728,87.951
  Bottom Layer w0.9: P2.15@48.983,87.951 cw(c47.297,86.2) R103.1@49.728,86.2 ; R103.1@49.674,86.146 R103.1@49.728,86.2 ; P2.15@49.728,88.725 R103.1@49.728,86.2 ; P2.15@50.473,87.951 ccw(c52.159,86.2) R103.1@49.728,86.2
IOIN32: P2.16 R104.1 R112.1 | length 34.7
  Top Layer w0.5: R112.1@38.087,71.855 38.087,73.087 40.3,75.3 40.3,83.257 P2.16@45.768,88.725 ; P2.16@44.494,88.725 cw(c41.418,88.725) 43.593,86.55 cw(c45.768,84.375) P2.16@45.768,87.451 ; P2.16@44.994,88.725 cw(c43.125,88.725) 44.447,87.404 cw(c45.768,86.082) P2.16@45.768,87.951
  Bottom Layer w0.9: P2.16@45.028,87.946 cw(c43.39,86.223) R104.1@45.768,86.223 ; R104.1@45.581,86.068 ccw(c45.13,86.519) 45.768,86.519 ; P2.16@45.768,88.725 R104.1@45.768,86.223 ; P2.16@46.508,87.946 ccw(c48.146,86.223) R104.1@45.768,86.223
IOIN_1: D56.1 K5.4 P5.2 P46.1 | length 48.3
  Bottom Layer w2: P5.2@167.132,45.237 cw(c170.44,45.237) D56.1@168.711,48.057 ; P5.2@167.132,45.709 ccw(c170.677,45.709) P46.1@168.17,43.202 ; P5.2@167.132,46.24 cw(c168.967,46.24) D56.1@168.711,48.057 ; P46.1@167.64,42.672 167.132,43.18 P5.2@167.132,45.72 167.132,47.157 ; 167.132,47.157 ccw(c168.056,46.233) 166.913,45.599 cw(c168.056,46.233) 167.132,47.157 ; 167.132,47.157 167.757,47.782 167.132,47.157 ; D56.1@168.711,48.057 ccw(c168.711,46.418) 167.552,47.577 cw(c168.711,46.418) D56.1@168.711,48.057 ; P5.2@166.882,45.72 cw(c169.748,45.72) 167.721,47.746 ccw(c169.748,45.72) P5.2@166.882,45.72
  Bottom Layer w3.5: K5.4@160.395,37.18 cw(c163.268,37.18) 161.236,39.211 ; K5.4@161.045,37.18 161.045,39.02 164.697,42.672 P46.1@167.64,42.672 ; 162.616,40.591 cw(c167.64,35.567) P46.1@167.64,42.672 ; 163.226,41.201 cw(c166.904,37.522) P46.1@167.64,42.672
NetD1_1: D1.1 R2.2 R17.1 U1.2 | length 10.6
  Top Layer w0.9: U1.2@170.742,69.887 ccw(c169.148,71.481) D1.1@171.402,71.481 ; U1.2@170.954,69.675 171.402,70.123 D1.1@171.402,72.57 ; D1.1@171.119,71.887 cw(c170.434,71.203) 171.402,71.203 cw(c172.37,71.203) D1.1@171.685,71.887
  Bottom Layer w0.9: U1.2@170.742,69.463 cw(c169.754,68.475) 171.151,68.475 ; R2.2@171.151,67.208 U1.2@171.151,69.478 ; v1(171.345,73.38) R17.1@171.345,74.218
NetD1_2: D1.2 LD1.1 R1.2 R17.2 | length 18.5
  Top Layer w0.9: LD1.1@169.394,82.265 ccw(c170.505,81.97) 169.692,81.158 ; LD1.1@169.938,82.121 169.938,80.912 171.402,79.448 D1.2@171.402,77.47 ; LD1.1@170.264,82.034 ccw(c172.251,81.507) 170.797,80.053 ; D1.2@171.119,78.153 ccw(c170.434,78.837) 171.402,78.837 ccw(c172.37,78.837) D1.2@171.685,78.153 ; 169.938,81.306 ccw(c169.123,81.306) 169.699,81.882 cw(c169.123,81.306) 169.938,81.306 ; 169.938,81.306 cw(c170.753,81.306) 170.177,81.882 ccw(c170.753,81.306) 169.938,81.306
  Bottom Layer w0.9: LD1.1@169.699,82.36 ccw(c169.123,82.936) 169.938,82.936 ccw(c170.753,82.936) LD1.1@170.177,82.36 ; LD1.1@169.938,82.121 169.938,83.057 R1.2@170.707,83.826 ccw(c171.904,82.629) LD1.1@170.265,82.205 ; R17.2@171.345,75.945 v1(171.345,76.73)
NetD2_1: D2.1 R4.2 R18.1 U2.2 | length 12.9
  Top Layer w0.9: U2.2@166.382,60.531 166.382,61.832 167.144,62.594 D2.1@167.144,68.405 ; D2.1@166.861,67.722 cw(c166.176,67.038) 167.144,67.038 cw(c168.112,67.038) D2.1@167.427,67.722
  Bottom Layer w0.9: U2.2@166.17,60.319 cw(c165.182,59.331) 166.579,59.331 ; R4.2@166.579,58.9 U2.2@166.579,60.334 ; v1@167.087,69.387 R18.1@167.087,70.053
  other v1: 167.15,69.15
NetD2_2: D2.2 LD2.1 R3.2 R18.2 | length 19.7
  Top Layer w0.9: LD2.1@165.635,78.834 cw(c165.059,78.258) 165.874,78.258 cw(c166.689,78.258) LD2.1@166.113,78.834 ; LD2.1@165.874,79.073 165.874,76.476 167.144,75.206 D2.2@167.144,73.305 ; D2.2@166.861,73.988 ccw(c166.176,74.672) 167.144,74.672 ccw(c168.112,74.672) D2.2@167.427,73.988
  Bottom Layer w0.9: LD2.1@165.329,78.932 cw(c166.472,79.228) 165.637,80.062 ; LD2.1@165.635,79.312 ccw(c165.059,79.888) 165.874,79.888 ccw(c166.689,79.888) LD2.1@166.113,79.312 ; LD2.1@165.874,79.073 165.874,80.299 166.751,81.176 ; LD2.1@166.201,79.157 cw(c168.242,79.685) 166.751,81.176 ; R3.2@166.751,83.826 166.751,81.176 ; R18.2@167.087,71.78 v1(167.087,72.562)
NetD3_1: D3.1 R6.2 R19.1 U3.2 | length 12.3
  Top Layer w0.9: U3.2@161.598,69.887 ccw(c159.246,72.239) D3.1@162.572,72.239 ; U3.2@161.81,69.675 162.572,70.437 D3.1@162.572,72.469 ; U3.2@162.234,69.251 ccw(c161.419,70.066) 162.572,70.066 ; D3.1@162.289,71.786 cw(c161.604,71.102) 162.572,71.102 cw(c163.54,71.102) D3.1@162.855,71.786
  Bottom Layer w0.9: U3.2@161.598,69.463 cw(c160.61,68.475) 162.007,68.475 ; R6.2@162.007,67.208 U3.2@162.007,69.478 ; v1(162.515,73.36) R19.1@162.515,74.117
NetD3_2: D3.2 LD4.1 R5.2 R19.2 | length 12.5
  Top Layer w0.9: LD4.1@161.571,81.882 cw(c160.995,81.306) 161.81,81.306 cw(c162.625,81.306) LD4.1@162.049,81.882 ; LD4.1@161.81,82.121 161.81,80.615 162.572,79.853 D3.2@162.572,77.369 ; D3.2@162.289,78.052 ccw(c161.604,78.736) 162.572,78.736 ccw(c163.54,78.736) D3.2@162.855,78.052
  Bottom Layer w0.9: LD4.1@161.81,82.121 161.81,83.007 R5.2@162.629,83.826 ccw(c163.899,82.555) LD4.1@162.14,82.19 ; R19.2@162.515,75.844 v1(162.515,76.665)
NetD4_1: D4.1 R8.2 R20.1 U4.2 | length 15.1
  Top Layer w0.9: U4.2@157.238,60.531 157.238,61.188 158.508,62.458 D4.1@158.508,68.405 ; U4.2@157.538,60.531 cw(c159.848,60.531) 158.215,62.165 ; D4.1@158.225,67.722 cw(c157.54,67.038) 158.508,67.038 cw(c159.476,67.038) D4.1@158.791,67.722
  Bottom Layer w0.9: U4.2@157.026,60.319 cw(c156.038,59.331) 157.435,59.331 ; R8.2@157.435,58.9 U4.2@157.435,60.334 ; v1(158.451,69.249) R20.1@158.451,70.053
NetD4_2: D4.2 LD5.1 R7.2 R20.2 | length 16.1
  Top Layer w0.9: LD5.1@157.507,78.834 cw(c156.931,78.258) 157.746,78.258 cw(c158.561,78.258) LD5.1@157.985,78.834 ; LD5.1@157.746,79.073 157.746,76.704 158.508,75.942 D4.2@158.508,73.305 ; D4.2@158.225,73.988 ccw(c157.54,74.672) 158.508,74.672 ccw(c159.476,74.672) D4.2@158.791,73.988
  Bottom Layer w0.9: LD5.1@157.507,79.312 ccw(c156.931,79.888) 157.746,79.888 ccw(c158.561,79.888) LD5.1@157.985,79.312 ; LD5.1@157.746,79.073 157.746,80.896 159.073,82.223 R7.2@159.073,83.826 ; R20.2@158.451,71.78 v1(158.451,72.449)
NetD5_1: D5.1 R10.2 R21.1 U5.2 | length 16.1
  Top Layer w0.9: U5.2@152.962,69.887 ccw(c152.146,70.703) 153.3,70.703 ; 153.101,71.126 cw(c154.413,69.813) D5.1@154.439,71.669 ; U5.2@153.174,69.675 153.3,69.801 153.3,71.325 D5.1@154.444,72.469 ; U5.2@153.3,69.529 cw(c155.761,69.529) D5.1@154.628,71.714 ; 153.3,71.009 cw(c154.994,71.009) D5.1@154.214,72.513 ; D5.1@153.738,71.763 ccw(c152.289,73.212) D5.1@154.337,73.286
  Bottom Layer w0.9: U5.2@152.962,69.463 cw(c151.974,68.475) 153.371,68.475 ; R10.2@153.371,67.208 U5.2@153.371,69.478 ; v1(154.387,73.288) R21.1@154.387,74.117
NetD5_2: D5.2 LD6.1 R9.2 R21.2 | length 14.9
  Top Layer w0.9: LD6.1@153.682,82.121 153.682,81.043 154.444,80.281 D5.2@154.444,77.369 ; D5.2@154.161,78.052 ccw(c153.476,78.736) 154.444,78.736 ccw(c155.412,78.736) D5.2@154.727,78.052 ; 153.682,81.306 ccw(c152.867,81.306) 153.443,81.882 cw(c152.867,81.306) 153.682,81.306 ; 153.682,81.306 cw(c154.497,81.306) 153.921,81.882 ccw(c154.497,81.306) 153.682,81.306
  Bottom Layer w0.9: LD6.1@153.682,82.121 153.682,82.957 R9.2@154.551,83.826 ; LD6.1@154.015,82.174 cw(c155.902,82.475) R9.2@154.551,83.826 ; 154.368,83.643 cw(c154.915,83.095) R9.2@154.915,83.87 ; R21.2@154.387,75.844 v1(154.387,76.687) ; R9.2@155.009,83.826 R9.2@154.551,83.826
NetD6_1: D6.1 R12.2 R22.1 U6.2 | length 15.4
  Top Layer w0.9: U6.2@148.602,60.531 148.602,61.377 149.872,62.647 D6.1@149.872,68.405 ; U6.2@148.902,60.531 cw(c151.669,60.531) 149.712,62.487 ; D6.1@149.589,67.722 cw(c148.904,67.038) 149.872,67.038 cw(c150.84,67.038) D6.1@150.155,67.722
  Bottom Layer w0.9: U6.2@148.39,60.319 cw(c147.402,59.331) 148.799,59.331 ; R12.2@148.799,58.875 U6.2@148.799,60.334 ; v1(149.803,69.228) R22.1@149.803,70.02
NetD6_2: D6.2 LD3.1 R11.2 R22.2 | length 25.8
  Top Layer w0.3: D6.2@149.376,72.41 cw(c148.18,71.214) 149.872,71.214 cw(c151.564,71.214) D6.2@150.368,72.41 ; D6.2@149.556,72.325 cw(c148.791,71.56) 149.872,71.56 ; D6.2@149.589,72.622 cw(c148.904,71.938) 149.872,71.938 cw(c150.84,71.938) D6.2@150.155,72.622 ; D6.2@149.625,72.874 ccw(c149.371,73.305) D6.2@149.872,73.305 149.872,71.058 150.871,70.059 ; 149.872,71.894 cw(c150.481,71.894) D6.2@150.05,72.325 ; D6.2@149.872,73.25 ccw(c150.481,73.25) D6.2@150.05,72.819
  Top Layer w0.9: LD3.1@149.379,78.834 cw(c148.803,78.258) 149.618,78.258 cw(c150.433,78.258) LD3.1@149.857,78.834 ; D6.2@149.618,73.559 LD3.1@149.618,79.073 ; 149.618,75.285 ccw(c151.453,75.285) D6.2@150.155,73.988
  Bottom Layer w0.9: LD3.1@149.379,79.312 ccw(c148.803,79.888) 149.618,79.888 ccw(c150.433,79.888) LD3.1@149.857,79.312 ; LD3.1@149.618,79.073 149.618,80.668 150.945,81.995 R11.2@150.945,83.826 ; R22.2@149.803,71.747 v1(149.803,72.572)
NetD7_1: D7.1 R14.2 R23.1 U7.2 | length 11
  Top Layer w0.9: U7.2@144.538,69.675 144.538,70.691 D7.1@146.316,72.469 ; 144.95,71.103 cw(c146.316,69.738) D7.1@146.316,71.669 ; D7.1@145.57,71.723 ccw(c144.027,73.266) D7.1@146.209,73.266
  Bottom Layer w0.9: U7.2@144.326,69.463 cw(c143.338,68.475) 144.735,68.475 ; R14.2@144.735,67.208 U7.2@144.735,69.478 ; v1(146.259,73.266) R23.1@146.259,74.117
NetD7_2: D7.2 LD7.1 R13.2 R23.2 | length 15
  Top Layer w0.9: LD7.1@145.315,81.882 cw(c144.739,81.306) 145.554,81.306 cw(c146.369,81.306) LD7.1@145.793,81.882 ; LD7.1@145.554,82.121 145.554,80.246 146.316,79.484 D7.2@146.316,77.369 ; D7.2@146.033,78.052 ccw(c145.348,78.736) 146.316,78.736 ccw(c147.284,78.736) D7.2@146.599,78.052
  Bottom Layer w0.9: LD7.1@145.315,82.36 ccw(c144.739,82.936) 145.554,82.936 ccw(c146.369,82.936) LD7.1@145.793,82.36 ; LD7.1@145.554,82.121 145.554,83.054 146.326,83.826 ; LD7.1@145.881,82.204 cw(c147.528,82.624) 146.326,83.826 ; 146.074,83.574 cw(c146.787,82.861) R13.2@146.787,83.87 ; R23.2@146.259,75.844 v1@146.259,76.609 ; R13.2@146.881,83.826 146.326,83.826
  other v1: 146.225,76.85
NetD8_1: D8.1 R16.2 R24.1 U8.2 | length 15
  Top Layer w0.9: U8.2@139.966,60.531 139.966,60.891 141.35,62.275 141.35,68.011 D8.1@141.744,68.405 ; U8.2@140.266,60.531 cw(c141.859,60.531) 140.733,61.658 ; 141.35,66.087 cw(c143.663,66.087) D8.1@142.027,67.722
  Bottom Layer w0.9: U8.2@139.754,60.319 cw(c138.766,59.331) 140.163,59.331 ; R16.2@140.163,58.85 U8.2@140.163,60.334 ; v1@141.687,69.312 R24.1@141.687,70.053
  other v1: 141.7,69.1
NetD8_2: D8.2 LD8.1 R15.2 R24.2 | length 15.5
  Top Layer w0.9: LD8.1@141.251,78.834 cw(c140.675,78.258) 141.49,78.258 cw(c142.305,78.258) LD8.1@141.729,78.834 ; D8.2@141.49,73.559 LD8.1@141.49,79.073 ; 141.49,75.285 ccw(c143.325,75.285) D8.2@142.027,73.988
  Bottom Layer w0.9: LD8.1@141.251,79.312 ccw(c140.675,79.888) 141.49,79.888 ccw(c142.305,79.888) LD8.1@141.729,79.312 ; LD8.1@141.49,79.073 141.49,80.64 142.817,81.967 R15.2@142.817,83.826 ; R24.2@141.687,71.78 v1(141.687,72.513)
NetD9_1: D9.1 R34.2 R49.1 U9.2 | length 11.3
  Top Layer w0.9: U9.2@112.026,69.675 112.026,70.691 D9.1@113.804,72.469 ; 112.438,71.103 cw(c113.804,69.738) D9.1@113.804,71.669 ; D9.1@112.996,71.661 ccw(c111.305,73.353) D9.1@113.697,73.353
  Bottom Layer w0.9: U9.2@111.814,69.463 cw(c110.826,68.475) 112.223,68.475 ; U9.2@112.026,69.675 112.223,69.478 R34.2@112.223,67.208 ; v1(113.747,73.353) R49.1@113.747,74.117
NetD9_2: D9.2 LD9.1 R33.2 R49.2 | length 13.9
  Top Layer w0.9: LD9.1@112.803,81.882 cw(c112.227,81.306) 113.042,81.306 cw(c113.857,81.306) LD9.1@113.281,81.882 ; LD9.1@113.042,82.121 113.042,80.708 113.804,79.946 D9.2@113.804,77.369 ; D9.2@113.521,78.052 ccw(c112.836,78.736) 113.804,78.736 ccw(c114.772,78.736) D9.2@114.087,78.052
  Bottom Layer w0.9: LD9.1@113.042,82.121 113.042,82.967 113.901,83.826 ; LD9.1@113.375,82.177 cw(c115.235,82.492) 113.901,83.826 ; R49.2@113.747,75.844 v1@113.747,76.528 ; R33.2@115.385,83.826 113.901,83.826
  other v1: 113.75,76.75
NetD10_1: D10.1 R36.2 R50.1 U10.2 | length 15
  Top Layer w0.9: U10.2@115.582,60.531 115.582,60.757 116.95,62.125 116.95,67.995 D10.1@117.36,68.405 ; U10.2@115.882,60.531 cw(c117.152,60.531) 116.254,61.429 ; 116.95,66.048 cw(c119.318,66.048) D10.1@117.643,67.722
  Bottom Layer w0.9: U10.2@115.37,60.319 cw(c114.382,59.331) 115.779,59.331 ; R36.2@115.779,58.875 U10.2@115.779,60.334 ; v1(117.303,69.078) R50.1@117.303,70.053
NetD10_2: D10.2 LD10.1 R35.2 R50.2 | length 17.5
  Top Layer w0.9: LD10.1@116.867,78.834 cw(c116.291,78.258) 117.106,78.258 cw(c117.921,78.258) LD10.1@117.345,78.834 ; D10.2@117.106,73.559 LD10.1@117.106,79.073 ; 117.106,75.285 ccw(c118.941,75.285) D10.2@117.643,73.988 ; D10.2@117.106,73.368 ccw(c117.899,73.368) 117.338,72.807 cw(c117.899,73.368) D10.2@117.106,73.368
  Bottom Layer w0.9: LD10.1@116.867,79.312 ccw(c116.291,79.888) 117.106,79.888 ccw(c117.921,79.888) LD10.1@117.345,79.312 ; LD10.1@117.106,79.073 117.106,80.381 119.449,82.724 R35.2@119.449,83.826 ; R50.2@117.303,71.78 v1(117.303,72.772)
NetD11_1: D11.1 R38.2 R51.1 U11.2 | length 13.9
  Top Layer w0.9: U11.2@107.454,60.531 108.825,61.902 108.825,67.998 D11.1@109.232,68.405 ; 108.825,66.055 cw(c111.182,66.055) D11.1@109.515,67.722
  Bottom Layer w0.9: U11.2@107.242,60.319 cw(c106.254,59.331) 107.651,59.331 ; R38.2@107.651,58.8 U11.2@107.651,60.334 ; v1(109.175,69.225) R51.1@109.175,70.053
NetD11_2: D11.2 LD11.1 R37.2 R51.2 | length 20.7
  Top Layer w0.9: LD11.1@108.739,78.834 cw(c108.163,78.258) 108.978,78.258 cw(c109.793,78.258) LD11.1@109.217,78.834 ; D11.2@108.949,73.988 ccw(c108.264,74.672) 109.232,74.672 ccw(c110.2,74.672) D11.2@109.515,73.988 ; LD11.1@108.978,79.073 108.978,75.822 109.232,75.568 D11.2@109.232,73.305
  Bottom Layer w0.9: LD11.1@108.415,79.073 cw(c110.027,79.073) 108.887,80.212 ; LD11.1@108.739,79.312 ccw(c108.163,79.888) 108.978,79.888 ccw(c109.793,79.888) LD11.1@109.217,79.312 ; LD11.1@108.978,79.073 108.978,80.303 111.321,82.646 R37.2@111.321,83.826 ; R51.2@109.175,71.78 v1(109.175,72.575) ; LD11.1@109.315,79.073 cw(c113.099,79.073) 110.424,81.749
NetD12_1: D12.1 R40.2 R52.1 U12.2 | length 10.9
  Top Layer w0.9: U12.2@136.41,69.675 136.41,70.691 D12.1@138.188,72.469 ; 136.822,71.103 cw(c138.188,69.738) D12.1@138.188,71.669 ; D12.1@137.52,71.801 ccw(c136.164,73.156) D12.1@138.081,73.156
  Bottom Layer w0.9: U12.2@136.198,69.463 cw(c135.21,68.475) 136.607,68.475 ; R40.2@136.607,67.208 U12.2@136.607,69.478 ; v1(138.131,73.156) R52.1@138.131,74.117
NetD12_2: D12.2 LD12.1 R39.2 R52.2 | length 16.1
  Top Layer w0.9: LD12.1@137.426,82.121 137.426,81.074 138.188,80.312 D12.2@138.188,77.369 ; D12.2@137.905,78.052 ccw(c137.22,78.736) 138.188,78.736 ccw(c139.156,78.736) D12.2@138.471,78.052 ; 137.426,81.306 ccw(c136.611,81.306) 137.187,81.882 cw(c136.611,81.306) 137.426,81.306 ; 137.426,81.306 cw(c138.241,81.306) 137.665,81.882 ccw(c138.241,81.306) 137.426,81.306
  Bottom Layer w0.9: LD12.1@137.187,82.36 ccw(c136.611,82.936) 137.426,82.936 ccw(c138.241,82.936) LD12.1@137.665,82.36 ; LD12.1@137.426,82.121 137.426,83.076 138.176,83.826 ; LD12.1@137.751,82.211 cw(c139.347,82.654) 138.176,83.826 ; R52.2@138.131,75.844 v1@138.131,76.694 ; R39.2@139.261,83.826 138.176,83.826
  other v1: 138.25,76.875